# Altium PCB MGMEZZ04.PcbDoc (part 8 of 9)
Units mil, origin at the board's own origin, x right, y up, seen from the top; angles counter-clockwise.
Board outline 3790 x 5472.44 mil, 10 copper layers (TopLayer, InternalPlane1, MidLayer1, InternalPlane2, MidLayer2, MidLayer3, InternalPlane3, MidLayer4, InternalPlane4, BottomLayer), stack 57.08 mil thick; 846 components, 745 nets, 3323 pads, 1906 vias.
Unrouted connection lines stored in the file: 128.
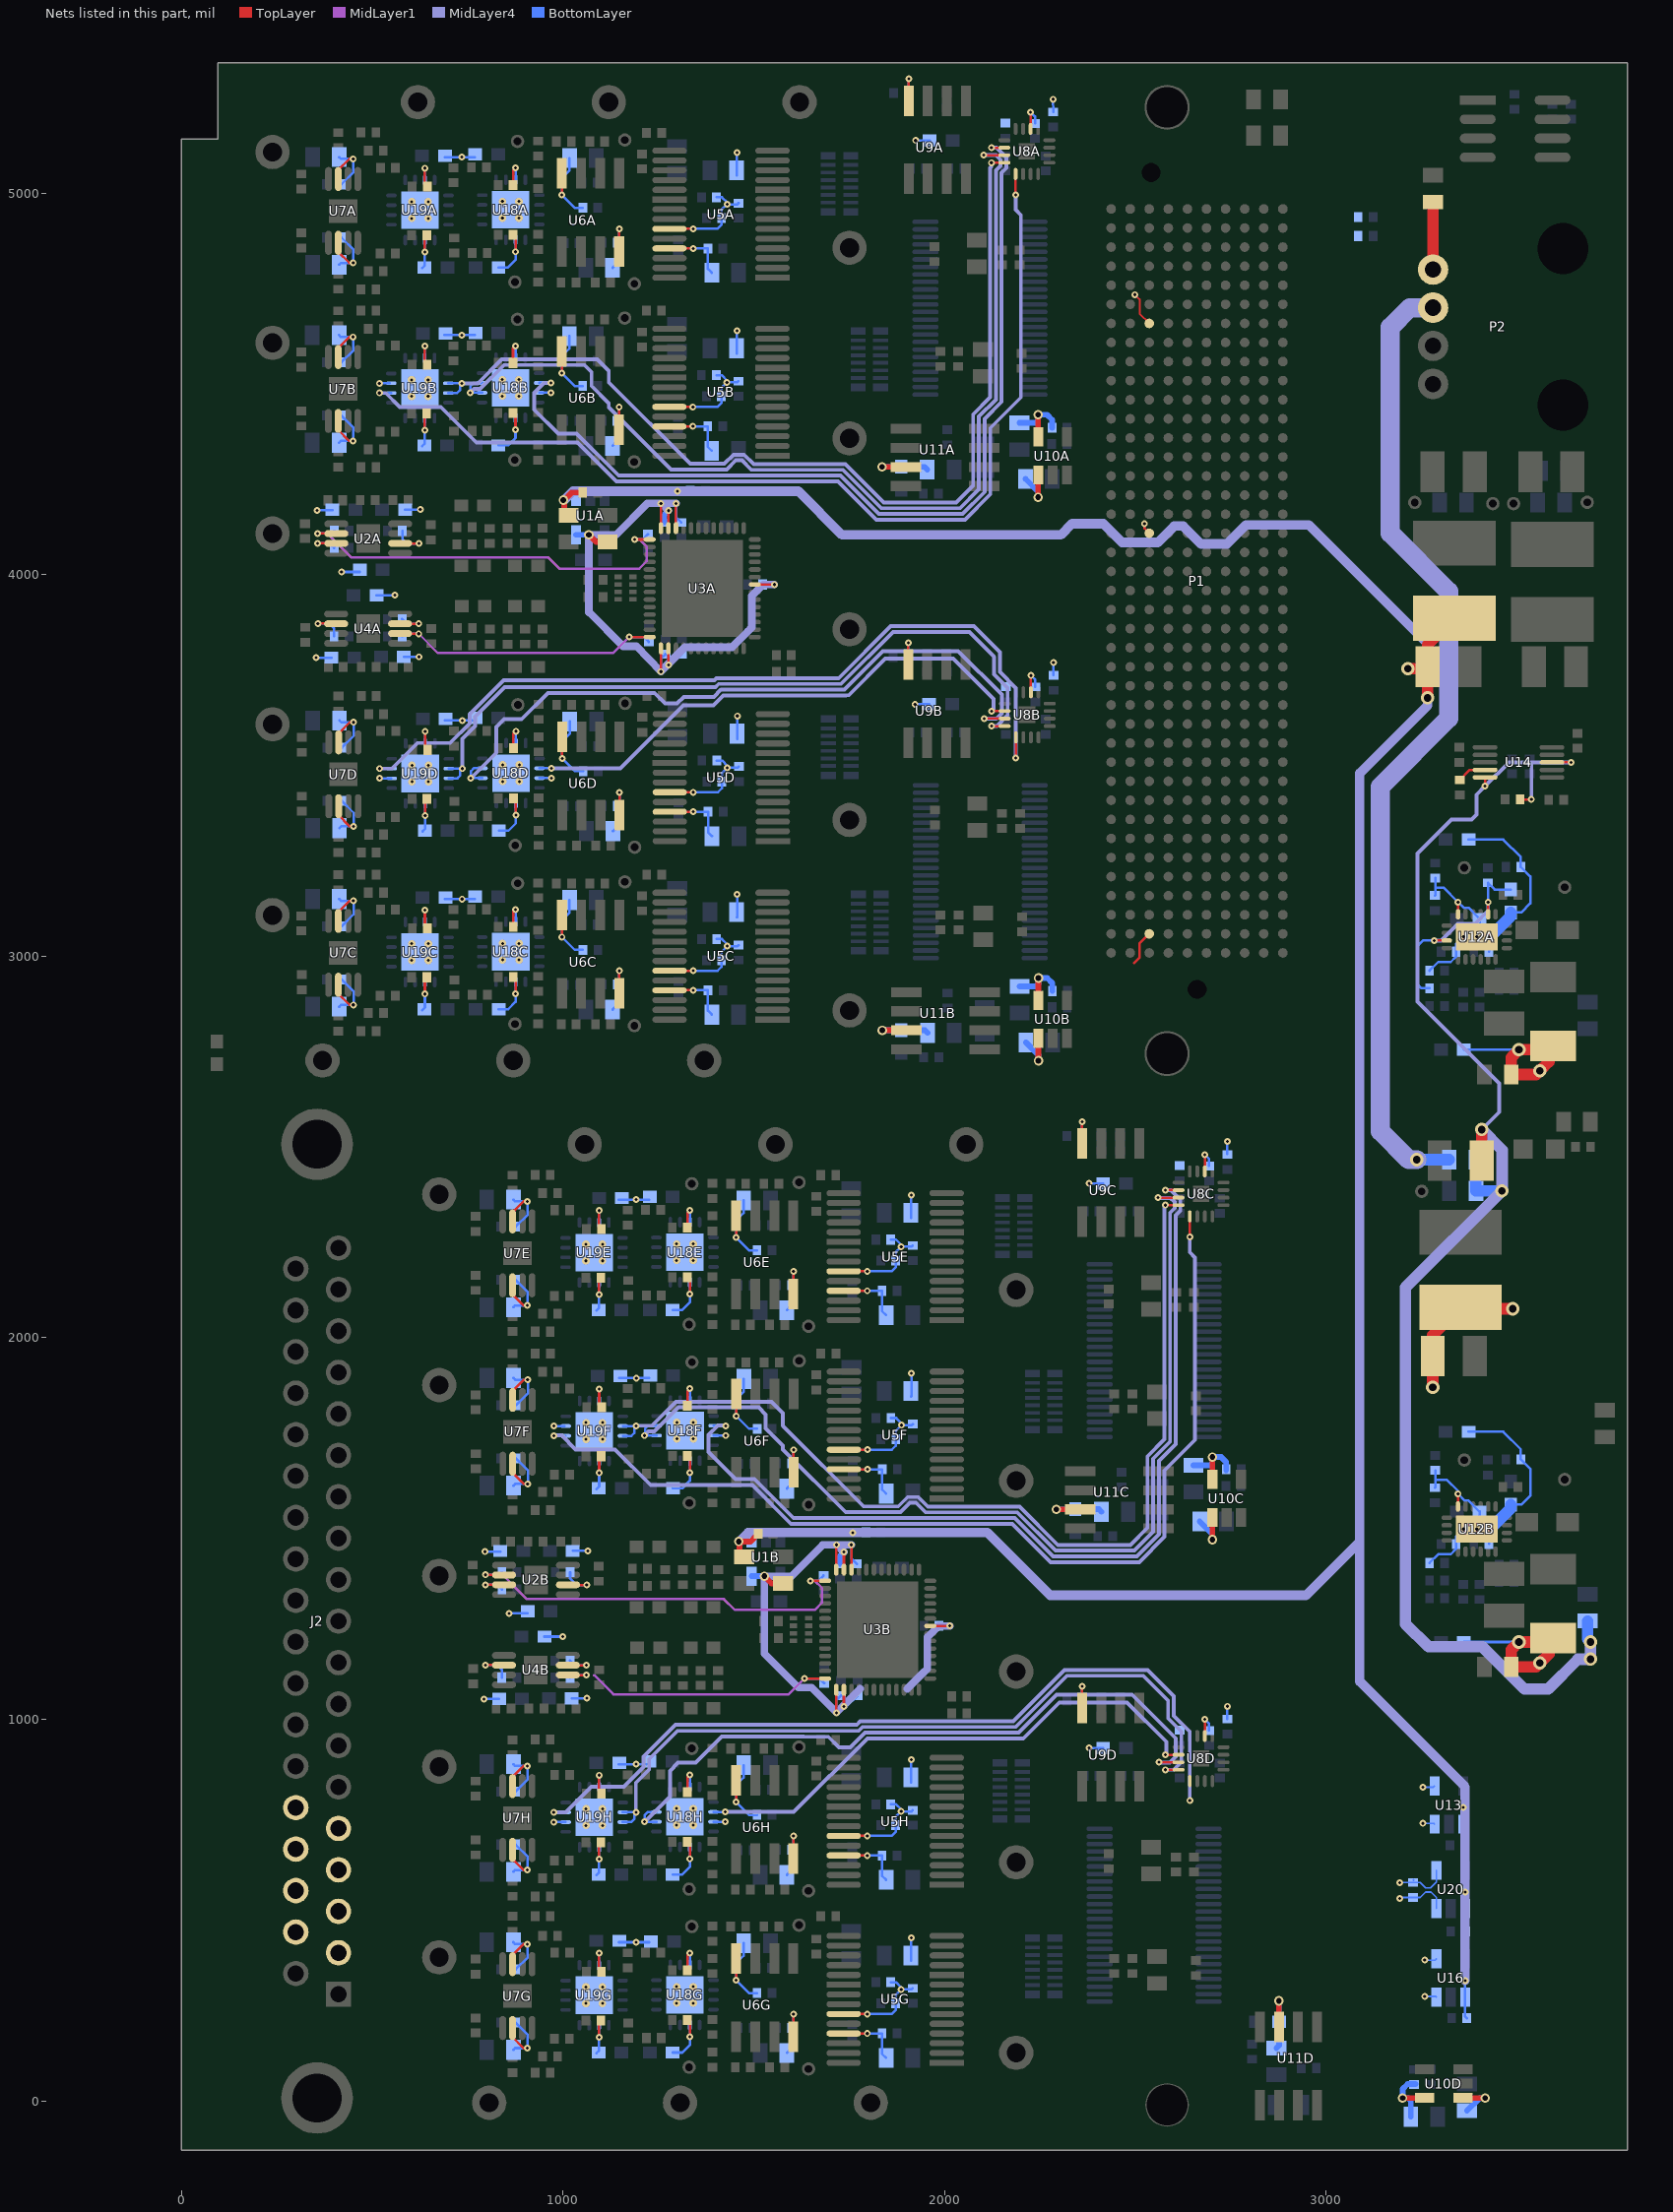
[diagram p16: the nets of this part, all layers, seen from the top]

## Via types
v1: diameter 18, hole 8, TopLayer to BottomLayer, 1296 vias
v2: diameter 18, hole 8, TopLayer to BottomLayer, tented both sides, 203 vias
v3: diameter 19.68, hole 7.87, TopLayer to BottomLayer, 188 vias
v4: diameter 25, hole 15, TopLayer to BottomLayer, tented both sides, 99 vias
v5: diameter 25, hole 15, TopLayer to BottomLayer, 72 vias
v6: diameter 35, hole 20, TopLayer to BottomLayer, 48 vias

## Nets (pads, with @x,y where several pads share a name; then routed paths per layer and width w, separated by ;. In a path a pad name is that pad's centre, name@x,y a point inside that pad or via, vN(x,y) a via of type N, cw(c..) or ccw(c..) an arc to the next point about the centre after c; other vN are vias at no path point) (continued)
NULSWITCHCTRL0A: U8A.2 U18B.14 U18B.15 | length 2464.3
  TopLayer w6.5: v1(2122.64,5119.42) U8A.2@2156.58,5119.42
  MidLayer4 w10: v1(968.93,4502.78) 950.78,4502.78 925,4477 925,4432.63 987.63,4370 1035.86,4370 1145.86,4260 1727.36,4260 1827.94,4159.42 2047.37,4159.42 2105,4217.05 2105,4408.57 2149.5,4453.08 2149.5,5053.82 2161.64,5065.96 2161.64,5094.13 2136.36,5119.42 v1(2122.64,5119.42)
  BottomLayer w6.5: U18B.15@937.67,4477.19 v1@967.84,4477.19 ; U18B.14@937.67,4502.78 v1(968.93,4502.78) v1@971.84,4502.78
  other v1: 968.93,4477.19
NULSWITCHCTRL0B: U8B.2 U18D.14 U18D.15 | length 1454.3
  TopLayer w6.5: v1(2123.46,3642.75) U8B.2@2157.4,3642.75
  MidLayer4 w10: v1@966.71,3492.78 v1(969.99,3492.78) 1150.78,3492.78 1316,3658 1394.57,3658 1420.36,3683.79 1741.21,3683.79 1741.76,3684.33 1749.33,3684.33 1845,3780 2022.64,3780 2128.46,3674.19 v1@2128.46,3642.75
  BottomLayer w6.5: U18D.15@938.73,3467.19 v1@968.9,3467.19 ; U18D.14@938.73,3492.78 v1(969.99,3492.78) v1@972.9,3492.78
  other v1: 969.99,3467.19
NULSWITCHCTRL0C: U8C.2 U18F.14 U18F.15 | length 2462.4
  TopLayer w6.5: v1@2582.15,2387.11 U8C.2@2613.09,2387.11
  MidLayer4 w10: v1@1426.06,1770.47 1406.47,1770.47 1381.5,1745.5 1381.5,1700.32 1452.3,1629.52 1502,1629.52 1603.83,1527.69 2183.87,1527.69 2284.45,1427.11 2503.87,1427.11 2561.5,1484.74 2561.5,1677.08 2606.01,1721.58 2606.01,2321.51 2618.15,2333.65 2618.15,2361.82 2592.86,2387.11 v1(2579.15,2387.11)
  BottomLayer w6.5: U18F.15@1394.8,1743.83 v1@1424.97,1743.83 ; U18F.14@1394.8,1769.43 v1(1426.06,1769.43) v1@1428.97,1769.43
  other v1: 1426.06,1743.83
NULSWITCHCTRL0D: U8D.2 U18H.14 U18H.15 | length 1451.9
  TopLayer w6.5: v1(2579.15,907.11) U8D.2@2613.09,907.11
  MidLayer4 w10: v1@1424.4,757.13 v1(1425.68,757.13) 1604.92,757.13 1797.79,950 2206.34,950 2300.69,1044.35 2478.33,1044.35 2581.21,941.47 2581.21,909.17 v1(2579.15,907.11)
  BottomLayer w6.5: U18H.15@1394.42,731.54 v1@1424.59,731.54 ; U18H.14@1394.42,757.13 v1(1425.68,757.13) v1@1428.59,757.13
  other v1: 1425.68,731.54
NULSWITCHCTRL1A: U8A.3 U18B.6 U18B.7 | length 2658
  TopLayer w6.5: v1(2102.71,5099.73) U8A.3@2156.58,5099.73
  MidLayer4 w10: v1@757.39,4476.69 767.69,4486.99 783.2,4486.99 846.21,4550 1056.3,4550 1075,4531.3 1075,4495 1120,4450 1120,4439.39 1283.39,4276 1429.17,4276 1452.99,4299.82 1468.73,4299.82 1493.56,4275 1733.57,4275 1834.16,4174.42 2040.63,4174.42 2090,4223.79 2090,4414.79 2134.5,4459.29 2134.5,5060.04 2146.64,5072.18 2146.64,5087.92 2134.83,5099.73 v1(2102.71,5099.73)
  BottomLayer w6.5: U18B.6@788.06,4477.19 757.89,4477.19 757.89,4495.19 765.48,4502.78 U18B.7@788.06,4502.78
  other v1: 756.89,4477.19
NULSWITCHCTRL1B: U8B.3 U18D.6 U18D.7 | length 1872.2
  TopLayer w6.5: v1(2103.52,3623.07) U8B.3@2157.4,3623.07
  MidLayer4 w10: v1@758.95,3467.19 825,3533.24 825,3600.72 846.12,3621.83 891.83,3621.83 960.49,3690.49 1174.32,3690.49 1174.8,3690 1240,3690 1267.56,3662.44 1299.23,3662.44 1316.79,3680 1395.36,3680 1414.15,3698.79 1735,3698.79 1735.54,3699.33 1737.5,3699.33 1838.17,3800 2035.99,3800 2150,3685.99 2150,3637.43 2135.64,3623.07 v1@2106.52,3623.07
  BottomLayer w6.5: U18D.6@789.12,3467.19 758.95,3467.19 758.95,3485.19 766.54,3492.78 U18D.7@789.12,3492.78
  other v1: 757.95,3467.19
NULSWITCHCTRL1C: U8C.3 U18F.6 U18F.7 | length 2654.6
  TopLayer w6.5: v1@2562.21,2367.42 U8C.3@2613.09,2367.42
  MidLayer4 w10: v1@1214.39,1744.88 1224.19,1754.68 1239.7,1754.68 1302.72,1817.69 1512.8,1817.69 1531.5,1798.99 1531.5,1762.69 1576.5,1717.69 1576.5,1707.08 1740.58,1543 1884.98,1543 1909.5,1567.51 1925.24,1567.51 1950.06,1542.69 2190.08,1542.69 2290.66,1442.11 2497.14,1442.11 2546.5,1491.48 2546.5,1683.29 2591.01,1727.8 2591.01,2327.73 2603.15,2339.87 2603.15,2355.61 2592.02,2366.74 v1@2559.21,2366.74
  BottomLayer w6.5: U18F.6@1245.2,1743.83 1215.03,1743.83 1215.03,1761.83 1222.62,1769.43 U18F.7@1245.2,1769.43
  other v1: 1214.03,1743.83 2559.21,2367.42
NULSWITCHCTRL1D: U8D.3 U18H.6 U18H.7 | length 1869.8
  TopLayer w6.5: v1(2562.21,887.42) U8D.3@2613.09,887.42
  MidLayer4 w10: v1@1214.64,731.54 1280.69,797.59 1280.69,865.07 1301.81,886.18 1347.52,886.18 1416.18,954.84 1630,954.84 1630.49,954.35 1695.69,954.35 1723.25,926.79 1753.37,926.79 1791.57,965 2194.51,965 2293.86,1064.35 2491.68,1064.35 2605.69,950.34 2605.69,901.78 2590.65,886.74 2562.9,886.74 v1(2562.21,887.42)
  BottomLayer w6.5: U18H.6@1244.81,731.54 1214.64,731.54 1214.64,749.54 1222.23,757.13 U18H.7@1244.81,757.13
  other v1: 1213.64,731.54
NULSWITCHCTRL2A: U8A.4 U19B.14 U19B.15 | length 2558.7
  TopLayer w6.5: v1(2122.64,5080.05) U8A.4@2156.58,5080.05
  MidLayer4 w10: v1(735.03,4501.99) 776.99,4501.99 840,4565 1090,4565 1120,4535 1120,4504.81 1333.81,4291 1422.96,4291 1446.78,4314.82 1474.95,4314.82 1499.77,4290 1739.79,4290 1840.37,4189.42 2030.43,4189.42 2075,4233.99 2075,4421 2119.5,4465.5 2119.5,5066.25 2122.64,5069.39 v1(2122.64,5080.05)
  BottomLayer w6.5: U19B.15@699.86,4476.4 722.44,4476.4 730.03,4483.99 730.03,4501.99 U19B.14@699.86,4501.99
NULSWITCHCTRL2B: U8B.4 U19D.14 U19D.15 | length 1960.7
  TopLayer w6.5: v1(2123.46,3603.38) U8B.4@2157.4,3603.38
  MidLayer4 w10: v1(736.09,3491.99) 736.09,3569.69 770.31,3603.9 770.31,3628.31 847.49,3705.49 1399.63,3705.49 1407.93,3713.79 1728.79,3713.79 1865,3850 2065,3850 2130,3785 2130,3738.79 2165,3703.79 2165,3631.21 2137.17,3603.38 v1@2128.46,3603.38
  BottomLayer w6.5: U19D.15@700.92,3466.4 723.5,3466.4 731.09,3473.99 731.09,3491.99 U19D.14@700.92,3491.99
NULSWITCHCTRL2C: U8C.4 U19F.14 U19F.15 | length 2557.4
  TopLayer w6.5: v1@2582.15,2347.74 U8C.4@2613.09,2347.74
  MidLayer4 w10: v1@1192.17,1769.68 1233.49,1769.68 1296.5,1832.69 1546.5,1832.69 1576.5,1802.69 1576.5,1769.5 1788,1558 1878.77,1558 1903.29,1582.51 1931.45,1582.51 1956.28,1557.69 2196.29,1557.69 2296.87,1457.11 2486.93,1457.11 2531.5,1501.68 2531.5,1689.5 2576.01,1734.01 2576.01,2344.6 v1(2579.15,2347.74)
  BottomLayer w6.5: U19F.15@1157,1743.04 1179.58,1743.04 1187.17,1750.63 1187.17,1768.63 U19F.14@1157,1768.63
  other v1: 1192.17,1768.63
NULSWITCHCTRL2D: U8D.4 U19H.14 U19H.15 | length 1972.6
  TopLayer w6.5: v1(2579.15,867.74) U8D.4@2613.09,867.74
  MidLayer4 w10: v1@1191,756.34 1191,833.26 1226,868.26 1226,896 1299.84,969.84 1775.2,969.84 1785.36,980 2186.34,980 2320.69,1114.35 2520.69,1114.35 2585.69,1049.35 2585.69,1003.14 2620.69,968.14 2620.69,887.75 2600.67,867.74 v1(2579.15,867.74)
  BottomLayer w6.5: U19H.15@1156.61,730.75 1179.19,730.75 1186.78,738.34 1186.78,756.34 U19H.14@1156.61,756.34
  other v1: 1191.78,756.34
NULSWITCHCTRL3A: U8A.5 U19B.6 U19B.7 | length 2702.9
  TopLayer w6.5: v1@2186.11,4996.64 U8A.5@2186.11,5050.52
  MidLayer4 w10: v1(519,4476.4) 534.6,4476.4 ; 535.6,4476.4 572.21,4439.79 680.21,4439.79 773.17,4346.83 1037.82,4346.83 1139.65,4245 1721.15,4245 1821.73,4144.42 2053.58,4144.42 2120,4210.84 2120,4384.66 2200,4464.66 2200,4942.85 2186.11,4956.74 v1(2186.11,4995.64)
  BottomLayer w6.5: v1@516.09,4501.99 v1(519,4501.99) ; v1@519.09,4476.4 U19B.6@549.26,4476.4 ; v1@519.09,4501.99 U19B.7@546.35,4501.99
NULSWITCHCTRL3B: U8B.5 U19D.6 U19D.7 | length 2227.4
  TopLayer w6.5: v1@2186.92,3522.98 U8B.5@2186.93,3573.86
  MidLayer4 w10: v1(520.06,3491.99) 551.99,3491.99 618.99,3558.99 704.18,3558.99 755.31,3610.12 755.31,3634.52 844.77,3723.99 1396.92,3723.99 1401.72,3728.79 1722.57,3728.79 1858.79,3865 2076.83,3865 2145,3796.83 2145,3745 2186.92,3703.08 v1(2186.92,3519.98)
  BottomLayer w6.5: v1@517.15,3491.99 v1(520.06,3491.99) ; v1@520.15,3466.4 U19D.6@550.32,3466.4 ; v1@520.15,3491.99 U19D.7@547.41,3491.99
  other v1: 520.06,3466.4
NULSWITCHCTRL3C: U8C.5 U19F.6 U19F.7 | length 2704.3
  TopLayer w6.5: v1(2642.61,2264.33) U8C.5@2642.62,2318.21
  MidLayer4 w10: v1@976.13,1744.09 996.91,1744.09 1033.52,1707.48 1136.72,1707.48 1229.67,1614.52 1495.79,1614.52 1597.62,1512.69 2177.65,1512.69 2278.23,1412.11 2510.08,1412.11 2576.5,1478.53 2576.5,1652.35 2656.5,1732.35 2656.5,2210.54 2642.61,2224.43 v1(2642.61,2264.33)
  BottomLayer w6.5: v1@973.22,1768.63 v1(976.13,1768.63) ; v1@976.22,1743.04 U19F.6@1006.39,1743.04 ; v1@976.22,1768.63 U19F.7@1003.48,1768.63
  other v1: 976.13,1743.04
NULSWITCHCTRL3D: U8D.5 U19H.6 U19H.7 | length 2172.5
  MidLayer4 w10: v1(975.75,756.34) 1004.68,756.34 ; 1007.68,756.34 1074.68,823.34 1159.87,823.34 1211,874.47 1211,902.21 1294.97,986.18 1770.33,986.18 1779.15,995 2180.12,995 2314.48,1129.35 2532.52,1129.35 2600.69,1061.18 2600.69,1009.35 2642.61,967.43 v1(2642.61,787.33)
  BottomLayer w6.5: v1@972.84,756.34 v1(975.75,756.34) ; v1(975.75,730.75) U19H.6@1006.01,730.75 ; v1(975.75,756.34) U19H.7@1003.1,756.34
P1V8A: C13A.2 C14A.2 C15A.2 C16A.2 C17A.2 C19A.1 U1A.5 U3A.15 U3A.16 U3A.34 U3A.50 U3A.51 U3A.52 | length 1857.7
  TopLayer w6.5: v1(1256.81,3746.15) U3A.15@1256.81,3807.12 U3A.15@1256.81,3808.05 ; U3A.52@1256.81,4122.08 v1(1256.81,4187.05) ; v1(1276.49,3763.15) U3A.16@1276.49,3807.12 U3A.16@1276.49,3808.05 ; U3A.51@1276.49,4122.08 v1(1276.49,4168.05) ; U3A.50@1296.18,4122.08 v1(1296.18,4187.05) ; U3A.34@1498,3974.44 v1(1553.84,3974.44)
  TopLayer w15: v5(1068.11,4104.77) 1087.11,4085.77 C13A.2@1117.11,4085.77
  MidLayer4 w10: v1(1256.81,3746.15) v1@1257.49,3746.15 ; v1(1256.81,4187.05) v1@1257.49,4187.05
  MidLayer4 w20: v1(1256.81,3746.15) 1192.31,3812.65 1157.35,3812.65 1068.11,3901.89 v5(1068.11,4104.77) 1139.03,4104.77 1221.31,4187.05 v1(1256.81,4187.05) ; v1@1257.49,3748.15 1319.35,3810 1443.09,3810 1484,3850.91 1484,3851 1495,3862 1495,3945 1524.44,3974.44 v1(1553.84,3974.44) ; v1(1276.49,4168.05) 1257.49,4187.05 v1(1296.18,4187.05)
  BottomLayer w6.5: v1(1256.81,3746.15) 1256.81,3779.75 C15A.2@1269.11,3792.05 ; v1(1256.81,4187.05) v1@1257.49,4187.05 ; v1(1276.49,3763.15) 1283.21,3763.15 C16A.2@1312.11,3792.05 ; v1(1296.18,4187.05) 1296.86,4186.37 1296.86,4150.3 C14A.2@1310.11,4137.05 ; C19A.1@1527.48,3974.44 v1(1553.84,3974.44)
  BottomLayer w15: U1A.5@1034.61,4104.77 v5(1068.11,4104.77) ; v1@1257.49,4187.05 v1(1276.49,4168.05) 1266.11,4157.67 C17A.2@1266.11,4137.05
P1V8B: C13B.2 C14B.2 C15B.2 C16B.2 C17B.2 C19B.1 U1B.5 U3B.15 U3B.16 U3B.34 U3B.50 U3B.51 U3B.52 | length 1732.5
  TopLayer w6.5: v1(1716.5,1016.5) U3B.15@1716.5,1077.47 U3B.15@1716.5,1078.4 ; U3B.52@1716.5,1392.43 v1(1716.5,1457.4) ; v1(1736.18,1033.5) U3B.16@1736.18,1077.47 U3B.16@1736.18,1078.4 ; U3B.51@1736.18,1392.43 v1(1736.18,1438.4) ; U3B.50@1755.87,1392.43 v1(1755.87,1457.4) ; U3B.34@1957.69,1244.8 v1(2013.53,1244.8)
  TopLayer w15: v5(1527.8,1375.12) 1546.8,1356.12 C13B.2@1576.8,1356.12
  MidLayer4 w10: v1(1716.5,1016.5) v1@1717.18,1016.5 ; v1(1716.5,1457.4) v1@1717.18,1457.4
  MidLayer4 w20: v1@1716.5,1018.5 1652,1083 1617,1083 1527.8,1172.2 v5(1527.8,1375.12) 1598.72,1375.12 1681,1457.4 v1(1716.5,1457.4) ; v1@1717.18,1018.5 1779.04,1080.35 ; v1(1736.18,1438.4) 1717.18,1457.4 v1(1755.87,1457.4) ; 1902.78,1080.35 1943.69,1121.27 1943.69,1121.35 1954.69,1132.35 1954.69,1215.35 1984.13,1244.8 v1(2013.53,1244.8)
  BottomLayer w6.5: v1(1716.5,1016.5) 1716.5,1050.1 C15B.2@1728.8,1062.4 ; v1(1716.5,1457.4) v1@1717.18,1457.4 ; v1(1736.18,1033.5) 1742.9,1033.5 C16B.2@1771.8,1062.4 ; v1(1755.87,1457.4) 1756.55,1456.72 1756.55,1420.65 C14B.2@1769.8,1407.4 ; C19B.1@1987.17,1244.8 v1(2013.53,1244.8)
  BottomLayer w15: U1B.5@1494.3,1375.12 v5(1527.8,1375.12) ; v1@1717.18,1457.4 v1(1736.18,1438.4) 1725.8,1428.02 C17B.2@1725.8,1407.4
P2V5FILT: C5A.2 C5B.2 C7A.2 C7B.2 C58.1 C60.1 C63.1 C101.1 L9.2 R17A.1 R17B.1 U1A.1 U1B.1 U13.1 U16.1 U20.1 | length 8860.2
  TopLayer w15: C5A.2@1003.11,4167.77 1003.11,4195.77 1023.11,4215.77 C7A.2@1051.74,4215.77 ; C5B.2@1474.8,1426.12 1462.8,1438.12 1462.8,1466.12 1491.43,1466.12 C7B.2@1511.43,1486.12
  TopLayer w30: v6(3214.12,3754) 3265.76,3754 v6(3265.76,3677.26) ; C101.1@3265.76,3759.14 3265.76,3816.54 L9.2@3335.65,3886.42
  MidLayer4 w25: v5@1003.11,4195.77 1026.39,4219.05 v1(1300.11,4219.05) 1617,4219.05 1731.28,4104.77 2304.77,4104.77 2334,4134 2416,4134 2465,4085 2559,4085 2602,4128 2625,4128 2672,4081 2740,4081 2790,4131 2954,4131 3265.76,3819.24 v6(3265.76,3677.26) 3265.76,3657.26 3088,3479.5 3088,1098.78 3363.87,822.91 v1(3363.87,315.44) ; v5@1462.8,1466.12 1486.08,1489.4 v1(1759.8,1489.4) 2112.6,1489.4 2277,1325 2947,1325 3088,1466
  BottomLayer w6.5: v1(1300.11,4219.05) 1301.11,4220.05 R17A.1@1334.11,4220.05 ; v1(1759.8,1489.4) 1760.8,1490.4 R17B.1@1793.8,1490.4 ; v1(3358.87,768.91) U13.1@3358.87,725.43 3358.87,674.78 C58.1@3363.36,670.29 ; U16.1@3363.87,271.95 3363.87,221.31 C60.1@3368.36,216.82 ; U16.1@3363.87,275.95 v1@3363.87,319.44 ; U20.1@3363.87,503.91 3363.87,445.78 C63.1@3365.74,443.91 ; U20.1@3363.87,507.91 v1@3363.87,551.4
  BottomLayer w15: v5@1462.8,1466.12 U1B.1@1485.3,1466.12
  other v1: 3363.87,547.4
  other v5: 1460.8,1466.12 1001.11,4195.77
P3V3WRTLOWERRAIL: C65A.2 C73.1 R53A.1 R54A.1 U12A.2 U12A.9 U14.9 | length 642.8
  TopLayer w6.5: v1(3283.02,3041.22) U12A.9@3316.04,3041.22 ; C73.1@3349.98,3462.24 3376.3,3488.56 U14.9@3416.39,3488.56 ; U12A.2@3424.31,3110.12 v1(3424.31,3142.14)
  MidLayer4 w10: v1(3283.02,3041.22) 3301.22,3041.22 3345,3085 3390,3085 3424.31,3119.31 v1@3424.31,3140.14
  BottomLayer w6.5: R54A.1@3270.99,2916.01 3248.99,2916.01 3240,2925 3240,3027.73 3253.49,3041.22 v1(3283.02,3041.22) ; v1@3423.99,3140.45 R53A.1@3423.99,3192.64 3441.62,3175.01 C65A.2@3483.99,3175.01 ; v1@3423.99,3142.45 v1(3424.31,3142.14)
P5V5FILT: C53A.2 C53B.2 C53C.2 C53D.2 C79.1 J2.2 L12.2 U10A.1 U10B.1 U10C.1 U10D.1 | length 801.2
  TopLayer w15: v5(2245.28,4203.18) U10A.1@2245.28,4261.42 ; v5(2246.09,2726.52) U10B.1@2246.09,2784.76 ; v5(2701.78,1470.87) U10C.1@2701.78,1529.11 ; U10D.1@3358.39,7.47 v5(3416.63,7.47)
  TopLayer w30: v6(3279.26,1870.12) C79.1@3279.26,1952 3279.26,2007.22 L12.2@3352.04,2080 ; L12.2@3407,2076 v6(3488.88,2076)
  BottomLayer w15: C53A.2@2212,4251 2245.28,4217.72 v5(2245.28,4203.18) ; C53B.2@2212.81,2774.34 2246.09,2741.06 v5(2246.09,2726.52) ; C53C.2@2668.5,1518.69 2701.78,1485.41 v5(2701.78,1470.87) ; C53D.2@3368.81,-25.81 3402.09,7.47 v5(3416.63,7.47)
P5V5INT: C54.2 C78.1 Ip1.1 R51B.1 R70.1 R71.1 U14.3 U14.10 | length 3937.6
  TopLayer w6.5: v1(3416.39,3445.98) U14.10@3416.39,3468.87 ; C54.2@3508.36,3411.24 v1(3537.79,3411.24) ; U14.3@3608,3508.34 v1(3641.43,3508.34)
  TopLayer w30: C78.1@3407.5,2464 v6(3407.5,2545.88)
  MidLayer4 w10: v6(3407.5,2545.88) 3453,2591.38 3453,2667 3239,2881 3239,3269 3328,3358 3381,3358 3393.99,3370.99 3393.99,3378.79 3394,3423.59 v1(3416.39,3445.98) 3478.75,3508.34 3541,3508.34 ; v1(3537.79,3411.24) 3537.79,3505.13 3541,3508.34 ; v1(3641.43,3508.34) 3541,3508.34
  MidLayer4 w30: v6(3407.5,2545.88) 3461,2492.37 3461,2385.34 3208,2132.34 3208,1250 3268,1190 3409,1190 3519.33,1079.67 3581.67,1079.67 3659.62,1157.62 v6(3692.67,1157.62) v6(3692.67,1202.63)
  BottomLayer w30: R70.1@3392.38,2467 R71.1@3392.38,2385 Ip1.1@3460.38,2385 ; R51B.1@3685,1257.62 3685,1210.3 v6(3692.67,1202.63) v6(3692.67,1157.62)
PG_C2M: R32.2
PG_M2C: R31.2
POSSUPPLY: P2.1 R78.1 | length 166
  TopLayer w30: P2.1@3280,4800 R78.1@3280,4966
POWERENABLE: J2.21
PRSNT_M2C_L: P1.H2 | length 94.1
  TopLayer w6.5: 2496.34,2981.83 2511.34,2996.83 2511.34,3034.33 P1.H2@2536.34,3059.33
SCL_N: J2.3 U16.3 | length 31.6
  BottomLayer w4.5: v1(3258,273.81) 3287.01,273.81 U16.3@3288.87,271.95
SCL_P: J2.22 U16.4 | length 32.2
  BottomLayer w4.5: v1(3258,368.81) 3285.73,368.81 U16.4@3288.87,371.95
SDA_MISO_N: J2.5 U13.3 | length 31.6
  BottomLayer w4.5: v1(3253,727.28) 3282.01,727.28 U13.3@3283.87,725.43
SDA_MISO_P: J2.24 U13.4 | length 32.2
  BottomLayer w4.5: v1(3253,822.28) 3280.73,822.28 U13.4@3283.87,825.43
SDA_MOSI_N: J2.4 R56.2 U20.4 | length 140.3
  BottomLayer w4.5: v1(3193,571.71) 3193.57,572.28 R56.2@3228,572.28 3245.99,572.28 3260.18,558.1 3273.34,558.1 3288.87,573.63 U20.4@3288.87,603.91 ; R56.2@3228.99,578.28 R56.2@3228.99,579.91
SDA_MOSI_P: J2.23 R56.1 U20.3 | length 137.7
  BottomLayer w4.5: v1(3193,530.56) 3195.35,532.91 R56.1@3228,532.91 3245.99,532.91 3260.18,547.1 3274.94,547.1 3288.87,533.16 U20.3@3288.87,503.91
SPI.CSN: P1.H23 | length 30.2
  TopLayer w6.5: v2(2523.84,4134.33) 2523.84,4121.83 P1.H23@2536.34,4109.33
SPI_ADDR2: P1.H34 | length 90.5
  TopLayer w5: v2(2498.84,4734.33) 2511.34,4721.83 2511.34,4684.33 P1.H34@2536.34,4659.33
VCC5V0: P2.2 R70.2 | length 2589.5
  MidLayer4 w50: v6(3237.5,2467) 3216,2467 3142,2541 3142,3445 3321,3624 3321,3956 3168,4109 3168,4648.79 3219.21,4700 P2.2@3280,4700
  BottomLayer w30: v6(3237.5,2467) R70.2@3322.38,2467
VCM1A: C23A.1 C24A.2 C34A.1 U2A.2 U3A.1 | length 1201.6
  TopLayer w6.5: v1(357.14,4108.46) U2A.2@406.17,4108.46 ; v1(1188.31,4092.55) U3A.1@1227.28,4092.55 U3A.1@1229.11,4092.55
  MidLayer1 w6.5: v1(357.14,4108.46) 382.54,4108.46 446,4045 962,4045 990.75,4016.25 1200.2,4016.25 1219,4035.05 1219,4074 1200.45,4092.55 v1(1188.31,4092.55)
  BottomLayer w6.5: v1(356.11,4169.05) C23A.1@396.11,4169.05 ; v1(357.14,4108.46) 393.81,4108.46 C24A.2@400.46,4115.11 ; v1(1188.31,4092.55) 1209.24,4092.55 C34A.1@1223.11,4106.42
VCM1B: C23B.1 C24B.2 C34B.1 U2B.2 U3B.1 | length 1195.6
  TopLayer w6.5: v1@799.83,1378.81 U2B.2@845.86,1378.81 ; v1(1648,1362.91) U3B.1@1686.97,1362.91 U3B.1@1688.8,1362.91
  MidLayer1 w6.5: 816.83,1378.81 842.23,1378.81 905.69,1315.35 1421.69,1315.35 1450.44,1286.6 1659.89,1286.6 1678.69,1305.4 1678.69,1344.35 1660.14,1362.91 v1(1648,1362.91)
  BottomLayer w6.5: v1(795.8,1439.4) C23B.1@835.8,1439.4 ; v1(796.83,1378.81) C24B.2@830.5,1378.81 ; C24B.2@833.5,1378.81 C24B.2@840.15,1385.46 ; v1(1648,1362.91) 1668.93,1362.91 C34B.1@1682.8,1376.77
VCM2A: C29A.1 C30A.2 C35A.1 U3A.14 U4A.2 | length 832.4
  TopLayer w6.5: U4A.2@573.11,3845.41 v1(622.14,3845.41) ; v1(1173.31,3836.65) U3A.14@1227.28,3836.65
  MidLayer1 w6.5: v1(622.14,3845.41) 672.55,3795 1131.66,3795 v1(1173.31,3836.65)
  BottomLayer w6.5: C30A.2@578.82,3838.77 585.47,3845.41 v1(622.14,3845.41) ; C29A.1@583.17,3784.82 v1(623.17,3784.82) ; v1(1173.31,3836.65) 1209.52,3836.65 ; 1212.52,3836.65 C35A.1@1225.11,3824.05
VCM2B: C29B.1 C30B.2 C35B.1 U3B.14 U4B.2 | length 832.4
  TopLayer w6.5: U4B.2@1012.8,1115.76 v1(1061.83,1115.76) ; v1@1636,1107 U3B.14@1686.97,1107
  MidLayer1 w6.5: 1081.83,1115.76 1132.24,1065.35 1591.35,1065.35 v1(1633,1107)
  BottomLayer w6.5: C30B.2@1018.51,1109.12 1025.16,1115.76 v1(1061.83,1115.76) ; C29B.1@1022.86,1055.17 v1(1062.86,1055.17) ; v1(1633,1107) 1672.21,1107 C35B.1@1684.8,1094.4
VDD1A: C1A.1 C2A.2 C40A.2 C40B.2 C43A.2 C43B.2 C44A.2 C44B.2 C47A.2 C47B.2 C48A.2 C48B.2 C51A.2 C52A.1 C77A.2 C88A.1 C88B.1 C89A.2 C89B.2 C92A.1 C92B.1 C93A.2 C93B.2 C96A.2 C96B.2 C110A.2 R27A.2 R37A.1 R41A.1 U2A.3 U5A.25 U5B.25 U6A.8 U6B.8 U7A.3 U7B.3 U8A.14 U9A.8 U10A.5 U18A.11 U18B.11 U19A.11 U19B.11 | length 2257.2
  TopLayer w6.5: v1(357.14,4082.31) U2A.3@406.17,4082.31 ; U7B.3@411.07,4570.65 411.07,4594.36 440.04,4623.34 v1(450.24,4623.34) ; U7A.3@411.31,5037.31 411.31,5061.03 440.29,5090 v1(450.49,5090) ; v1(637.86,4599.19) 637.86,4557.36 C93B.2@644.23,4550.99 ; v1(638.1,5065.85) 638.1,5024.03 C93A.2@644.48,5017.65 ; C89B.2@874.07,4559.82 C89B.2@869.23,4554.99 869.23,4593.56 v1(875.66,4599.99) ; C89A.2@874.31,5026.48 C89A.2@869.48,5021.65 869.48,5060.22 v1(875.9,5066.65) ; v1(997.08,4528.62) U6B.8@997.08,4585.62 ; v1(997.32,4995.28) U6A.8@997.32,5052.29 ; U5B.25@1278.86,4388.79 v1(1340.69,4388.79) ; U5A.25@1279.11,4855.45 v1(1340.94,4855.45) ; U9A.8@1906.01,5242.6 v1(1906,5299.66) ; U8A.14@2225.48,5168.63 v1(2225.48,5212.57)
  TopLayer w15: U10A.5@2245.28,4361.42 v5(2245.28,4419.66)
  BottomLayer w6.5: v1(357.14,4082.31) 388.25,4082.31 C2A.2@400.46,4070.11 ; C43B.2@413.37,4627.99 418.02,4623.34 450.86,4623.34 450.86,4588.04 C44B.2@419.45,4556.62 ; C43A.2@413.61,5094.65 418.26,5090 451.11,5090 451.11,5054.7 C44A.2@419.69,5023.29 ; v1(419.69,4007.38) C1A.1@467.68,4007.38 ; U19B.11@637.86,4567.93 v1(637.86,4599.19) ; U19A.11@638.1,5034.59 v1(638.1,5065.85) ; C92B.1@689.86,4627.99 v1(735.25,4627.99) C88B.1@768.86,4627.99 ; C92A.1@690.11,5094.65 v1(735.5,5094.65) C88A.1@769.11,5094.65 ; U18B.11@875.66,4568.73 v1(875.66,4599.99) ; U18A.11@875.9,5035.39 v1(875.9,5066.65) ; C96B.2@1016.86,4625.62 1016.86,4592.99 997.08,4573.2 v1(997.08,4528.62) 1030.71,4494.99 C40B.2@1051.86,4494.99 ; C96A.2@1017.11,5092.29 1017.11,5059.65 997.32,5039.86 v1(997.32,4995.28) 1030.96,4961.65 C40A.2@1052.11,4961.65 ; v1(1340.69,4388.79) C48B.2@1379.49,4388.79 1379.49,4335.36 C47B.2@1389.86,4324.99 ; v1(1340.94,4855.45) C48A.2@1379.74,4855.45 1379.74,4802.02 C47A.2@1390.11,4791.65 ; C52A.1@1906,5262.6 v1(1906,5299.66) ; v1(1923.94,5138.24) C77A.2@1961,5138.24 ; v1(2225.48,5212.57) 2236.92,5201.13 C51A.2@2236.92,5182.95 ; v1(2284.44,5246.51) R37A.1@2284.56,5213.58
  BottomLayer w15: C110A.2@2196,4398 2239,4398 2245.28,4404.28 v5(2245.28,4419.66) 2268.34,4419.66 2281.65,4406.35 R27A.2@2281.65,4385.43
VDD1B: C1B.1 C2B.2 C40E.2 C40F.2 C43E.2 C43F.2 C44E.2 C44F.2 C47E.2 C47F.2 C48E.2 C48F.2 C51C.2 C52C.1 C77C.2 C88E.1 C88F.1 C89E.2 C89F.2 C92E.1 C92F.1 C93E.2 C93F.2 C96E.2 C96F.2 C110C.2 R27C.2 R37C.1 R41C.1 U2B.3 U5E.25 U5F.25 U6E.8 U6F.8 U7E.3 U7F.3 U8C.14 U9C.8 U10C.5 U18E.11 U18F.11 U19E.11 U19F.11 | length 2251.2
  TopLayer w6.5: v1@799.83,1352.66 U2B.3@845.86,1352.66 ; U7E.3@867.82,2305 867.82,2328.72 896.79,2357.69 v1(906.99,2357.69) ; U7F.3@868.2,1837.29 868.2,1861.01 897.18,1889.98 v1(907.38,1889.98) ; v1(1094.61,2333.54) 1094.61,2291.72 C93E.2@1100.98,2285.34 ; v1(1094.99,1865.83) 1094.99,1824.01 C93F.2@1101.37,1817.63 ; C89E.2@1330.82,2294.17 C89E.2@1325.98,2289.34 1325.98,2327.91 v1(1332.41,2334.34) ; C89F.2@1331.2,1826.46 C89F.2@1326.37,1821.63 1326.37,1860.2 v1(1332.8,1866.63) ; v1(1453.83,2262.97) U6E.8@1453.83,2319.98 ; v1(1454.21,1795.26) U6F.8@1454.21,1852.27 ; U5E.25@1735.61,2123.14 v1(1797.44,2123.14) ; U5F.25@1736,1655.43 v1(1797.83,1655.43) ; U9C.8@2360.4,2509.24 v1(2360.39,2566.31) ; U8C.14@2681.99,2436.32 v1(2681.99,2480.26)
  TopLayer w15: U10C.5@2701.78,1629.11 v5(2701.78,1687.35)
  BottomLayer w6.5: v1(796.83,1352.66) 824.94,1352.66 ; 827.94,1352.66 C2B.2@840.15,1340.46 ; v1(859.38,1277.74) C1B.1@907.37,1277.74 ; C43E.2@870.12,2362.34 874.77,2357.69 907.61,2357.69 907.61,2322.39 C44E.2@876.2,2290.98 ; C43F.2@870.5,1894.63 875.15,1889.98 908,1889.98 908,1854.68 C44F.2@876.58,1823.27 ; U19E.11@1094.61,2302.28 v1(1094.61,2333.54) ; U19F.11@1094.99,1834.57 v1(1094.99,1865.83) ; C92E.1@1146.61,2362.34 v1(1192,2362.34) C88E.1@1225.61,2362.34 ; C92F.1@1147,1894.63 v1(1192.39,1894.63) C88F.1@1226,1894.63 ; U18E.11@1332.41,2303.08 v1(1332.41,2334.34) ; U18F.11@1332.8,1835.37 v1(1332.8,1866.63) ; C96E.2@1473.61,2359.98 1473.61,2327.34 1453.83,2307.55 v1(1453.83,2262.97) 1487.46,2229.34 C40E.2@1508.61,2229.34 ; C96F.2@1474,1892.27 1474,1859.63 1454.21,1839.84 v1(1454.21,1795.26) 1487.85,1761.63 C40F.2@1509,1761.63 ; v1(1797.44,2123.14) C48E.2@1836.24,2123.14 1836.24,2069.71 C47E.2@1846.61,2059.34 ; v1(1797.83,1655.43) C48F.2@1836.63,1655.43 1836.63,1602 C47F.2@1847,1591.63 ; C52C.1@2360.39,2529.24 v1(2360.39,2566.31) ; v1(2378.33,2404.89) C77C.2@2415.39,2404.89 ; v1(2681.99,2480.26) 2693.43,2468.82 C51C.2@2693.43,2450.64 ; v1(2740.95,2514.2) R37C.1@2741.06,2481.27
  BottomLayer w15: C110C.2@2652.5,1665.69 2695.5,1665.69 2701.78,1671.97 v5(2701.78,1687.35) 2724.85,1687.35 2738.15,1674.04 R27C.2@2738.15,1653.12
VDD2A: C3A.2 C4A.1 C40C.2 C40D.2 C43C.2 C43D.2 C44C.2 C44D.2 C47C.2 C47D.2 C48C.2 C48D.2 C51B.2 C52B.1 C77B.2 C88C.1 C88D.1 C89C.2 C89D.2 C92C.1 C92D.1 C93C.2 C93D.2 C96C.2 C96D.2 C110B.2 R27B.2 R37B.1 R41B.1 U4A.3 U5C.25 U5D.25 U6C.8 U6D.8 U7C.3 U7D.3 U8B.14 U9B.8 U10B.5 U18C.11 U18D.11 U19C.11 U19D.11 | length 2256.2
  TopLayer w6.5: U7C.3@411.51,3092.68 411.51,3116.4 440.49,3145.37 v1(450.69,3145.37) ; U7D.3@412.13,3560.65 412.13,3584.36 441.1,3613.34 v1(451.3,3613.34) ; U4A.3@573.11,3871.56 v1(622.14,3871.56) ; v1(638.3,3121.22) 638.3,3079.4 C93C.2@644.68,3073.02 ; v1(638.92,3589.19) 638.92,3547.36 C93D.2@645.29,3540.99 ; C89C.2@874.51,3081.85 C89C.2@869.68,3077.02 869.68,3115.59 v1(876.11,3122.02) ; C89D.2@875.13,3549.82 C89D.2@870.29,3544.99 870.29,3583.56 v1(876.72,3589.99) ; v1(997.52,3050.65) U6C.8@997.52,3107.66 ; v1(998.14,3518.62) U6D.8@998.14,3575.62 ; U5C.25@1279.31,2910.82 v1(1341.14,2910.82) ; U5D.25@1279.92,3378.79 v1(1341.75,3378.79) ; U9B.8@1904.71,3764.89 v1(1904.7,3821.95) ; U8B.14@2226.3,3691.97 v1(2226.3,3735.91)
  TopLayer w15: U10B.5@2246.09,2884.76 v5(2246.09,2942.99)
  BottomLayer w6.5: C43C.2@413.81,3150.02 418.46,3145.37 451.31,3145.37 451.31,3110.07 C44C.2@419.89,3078.66 ; C43D.2@414.43,3617.99 419.08,3613.34 451.92,3613.34 451.92,3578.04 C44D.2@420.51,3546.62 ; C4A.1@511.6,3946.49 v1(559.58,3946.49) ; C3A.2@578.82,3883.77 591.02,3871.56 ; 592.02,3871.56 v1(622.14,3871.56) ; U19C.11@638.3,3089.96 v1(638.3,3121.22) ; U19D.11@638.92,3557.93 v1(638.92,3589.19) ; C92C.1@690.31,3150.02 v1(735.7,3150.02) C88C.1@769.31,3150.02 ; C92D.1@690.92,3617.99 v1(736.31,3617.99) C88D.1@769.92,3617.99 ; U18C.11@876.11,3090.76 v1(876.11,3122.02) ; U18D.11@876.72,3558.73 v1(876.72,3589.99) ; C96C.2@1017.31,3147.66 1017.31,3115.02 997.52,3095.23 v1(997.52,3050.65) 1031.16,3017.02 C40C.2@1052.31,3017.02 ; C96D.2@1017.92,3615.62 1017.92,3582.99 998.14,3563.2 v1(998.14,3518.62) 1031.77,3484.99 C40D.2@1052.92,3484.99 ; v1(1341.14,2910.82) C48C.2@1379.94,2910.82 1379.94,2857.39 C47C.2@1390.31,2847.02 ; v1(1341.75,3378.79) C48D.2@1380.55,3378.79 1380.55,3325.36 C47D.2@1390.92,3314.99 ; C52B.1@1904.7,3784.89 v1(1904.7,3821.95) ; v1(1922.64,3660.53) C77B.2@1959.7,3660.53 ; v1(2226.3,3735.91) 2237.74,3724.47 C51B.2@2237.74,3706.29 ; v1(2285.26,3769.85) R37B.1@2285.37,3736.92
  BottomLayer w15: C110B.2@2196.81,2921.34 2239.81,2921.34 2246.09,2927.62 v5(2246.09,2942.99) 2269.16,2942.99 2282.46,2929.69 R27B.2@2282.46,2908.77
VDD2B: C3B.2 C4B.1 C40G.2 C40H.2 C43G.2 C43H.2 C44G.2 C44H.2 C47G.2 C47H.2 C48G.2 C48H.2 C51D.2 C52D.1 C77D.2 C88G.1 C88H.1 C89G.2 C89H.2 C92G.1 C92H.1 C93G.2 C93H.2 C96G.2 C96H.2 C110D.2 R27D.2 R37D.1 R41D.1 U4B.3 U5G.25 U5H.25 U6G.8 U6H.8 U7G.3 U7H.3 U8D.14 U9D.8 U10D.5 U18G.11 U18H.11 U19G.11 U19H.11 | length 2257.2
  TopLayer w6.5: U7G.3@867.82,358.29 867.82,382.01 896.79,410.98 v1(906.99,410.98) ; U7H.3@867.82,825 867.82,848.72 896.79,877.69 v1(906.99,877.69) ; U4B.3@1012.8,1141.91 v1(1061.83,1141.91) ; v1(1094.61,386.83) 1094.61,345.01 C93G.2@1100.98,338.63 ; v1(1094.61,853.54) 1094.61,811.72 C93H.2@1100.98,805.34 ; C89G.2@1330.82,347.46 C89G.2@1325.98,342.63 1325.98,381.2 v1(1332.41,387.63) ; C89H.2@1330.82,814.17 C89H.2@1325.98,809.34 1325.98,847.91 v1(1332.41,854.34) ; v1(1453.83,316.26) U6G.8@1453.83,373.27 ; v1(1453.83,782.97) U6H.8@1453.83,839.98 ; U5G.25@1735.61,176.43 v1(1797.44,176.43) ; U5H.25@1735.61,643.14 v1(1797.44,643.14) ; U9D.8@2360.4,1029.24 v1(2360.39,1086.31) ; U8D.14@2681.99,956.32 v1(2681.99,1000.26)
  TopLayer w15: v5(3200.16,7.47) U10D.5@3258.39,7.47
  BottomLayer w6.5: C43G.2@870.12,415.63 874.77,410.98 907.61,410.98 907.61,375.68 C44G.2@876.2,344.27 ; C43H.2@870.12,882.34 874.77,877.69 907.61,877.69 907.61,842.39 C44H.2@876.2,810.98 ; C4B.1@951.29,1216.84 v1(999.27,1216.84) ; C3B.2@1018.51,1154.12 1030.71,1141.91 v1(1061.83,1141.91) ; U19G.11@1094.61,355.57 v1(1094.61,386.83) ; U19H.11@1094.61,822.28 v1(1094.61,853.54) ; C92G.1@1146.61,415.63 v1(1192,415.63) C88G.1@1225.61,415.63 ; C92H.1@1146.61,882.34 v1(1192,882.34) C88H.1@1225.61,882.34 ; U18G.11@1332.41,356.37 v1(1332.41,387.63) ; U18H.11@1332.41,823.08 v1(1332.41,854.34) ; C96G.2@1473.61,413.27 1473.61,380.63 1453.83,360.84 v1(1453.83,316.26) 1487.46,282.63 C40G.2@1508.61,282.63 ; C96H.2@1473.61,879.98 1473.61,847.34 1453.83,827.55 v1(1453.83,782.97) 1487.46,749.34 C40H.2@1508.61,749.34 ; v1(1797.44,176.43) C48G.2@1836.24,176.43 1836.24,123 C47G.2@1846.61,112.63 ; v1(1797.44,643.14) C48H.2@1836.24,643.14 1836.24,589.71 C47H.2@1846.61,579.34 ; C52D.1@2360.39,1049.24 v1(2360.39,1086.31) ; v1(2378.33,924.89) C77D.2@2415.39,924.89 ; v1(2681.99,1000.26) 2693.43,988.82 C51D.2@2693.43,970.64 ; v1(2740.95,1034.2) R37D.1@2741.06,1001.27
  BottomLayer w15: C110D.2@3221.81,-41.81 3221.81,1.19 3215.54,7.47 v5(3200.16,7.47) 3200.16,30.53 3213.46,43.84 R27D.2@3234.39,43.84
VLOWERRAILA: C61A.2 C65A.1 C66A.1 C67A.2 C68A.2 C69A.2 R49A.1 R57A.2 R59A.2 R63A.2 R65A.2 Rfb3A.2 U12A.6 U12A.21 | length 1421.8
  TopLayer w6.5: U12A.6@3345.57,3110.12 v1(3345.57,3142.14)
  TopLayer w30: C61A.2@3594.11,2765.41 C61A.2@3583.71,2755.01 ; C61A.2@3583.71,2755.01 3583.71,2723.71 v6(3560,2700) 3550,2690 R49A.1@3485,2690 3485,2735.01 v6(3505,2755.01) C61A.2@3583.71,2755.01
  BottomLayer w6.5: C66A.1@3270.62,2962.01 3293.61,2985 3326.37,2985 3340.36,2998.99 Rfb3A.2@3340.36,3012.01 3340.36,3031.65 U12A.21@3359.78,3051.06 ; R63A.2@3284.99,3159.38 3285.99,3160.38 3285.99,3180 ; R65A.2@3285.99,3205.01 3285.99,3180 ; C67A.2@3360.99,2755.01 v6(3505,2755.01) ; C69A.2@3372.99,3306.01 3463.99,3306.01 3509.99,3260.01 R59A.2@3509.99,3234.01 3535,3209 3535,3138.7 3511.31,3115.01 C65A.1@3483.99,3115.01 ; U12A.21@3394.78,3051.07 3401.99,3058.28 C68A.2@3401.99,3097.01 C68A.2@3401.2,3097.01 ; C68A.2@3401.2,3099.01 3373.2,3127 3360.7,3127 v1(3345.57,3142.14) 3307.7,3180 3285.99,3180 ; R57A.2@3426.36,3012.01 3426.36,3047.65 U12A.21@3429.78,3051.06
  BottomLayer w30: U12A.21@3359.78,3051.06 U12A.21@3429.78,3051.06 3483.99,3105.28 C65A.1@3483.99,3115.01
VLOWERRAILB: C61B.2 C65B.1 C66B.1 C67B.2 C68B.2 C69B.2 R49B.1 R57B.2 R59B.2 R63B.2 R65B.2 Rfb3B.2 U12B.6 U12B.21 | length 1428.1
  TopLayer w6.5: U12B.6@3345.57,1557.74 v1(3345.57,1590.76)
  TopLayer w30: C61B.2@3594.11,1213.03 C61B.2@3583.71,1202.63 ; C61B.2@3583.71,1202.63 3583.71,1171.33 v6(3560,1147.62) 3550,1137.62 R49B.1@3485,1137.62 3485,1182.63 v6(3505,1202.63) C61B.2@3583.71,1202.63
  BottomLayer w6.5: C66B.1@3270.62,1409.63 3293.61,1432.62 3326.37,1432.62 3340.36,1446.61 Rfb3B.2@3340.36,1459.63 3340.36,1479.27 U12B.21@3359.78,1498.68 ; R63B.2@3284.99,1607 3285.99,1608 3285.99,1627.62 ; R65B.2@3285.99,1652.63 3285.99,1627.62 ; C67B.2@3360.99,1202.63 v6(3505,1202.63) ; C69B.2@3372.99,1753.63 3463.99,1753.63 3509.99,1707.63 R59B.2@3509.99,1681.63 3535,1656.62 3535,1586.32 3511.31,1562.63 C65B.1@3483.99,1562.63 ; U12B.21@3394.78,1498.69 3401.99,1505.9 C68B.2@3401.99,1544.63 3401.2,1544.63 3372.83,1573 3363.33,1573 v1(3345.57,1590.76) 3345.57,1598.4 3316.35,1627.62 3285.99,1627.62 ; R57B.2@3426.36,1459.63 3426.36,1495.27 U12B.21@3429.78,1498.68
  BottomLayer w30: U12B.21@3359.78,1498.68 U12B.21@3429.78,1498.68 3483.99,1552.9 C65B.1@3483.99,1562.63
VSS1A: C9A.1 C10A.2 C36A.2 C36B.2 C37A.2 C37B.2 C45A.2 C45B.2 C46A.2 C46B.2 C49A.2 C49B.2 C50A.2 C50B.2 C80A.2 C80B.2 C83A.2 C83B.2 C90A.1 C90B.1 C91A.2 C91B.2 C94A.1 C94B.1 C95A.2 C95B.2 C102A.2 R39A.1 U2A.6 U5A.23 U5B.23 U6A.4 U6B.4 U7A.6 U7B.6 U11A.3 U18A.2 U18A.17 U18B.2 U18B.17 U19A.2 U19A.17 U19B.2 U19B.17 | length 2250.5
  TopLayer w6.5: U7B.6@411.07,4403.32 411.07,4379.61 440.04,4350.63 v1(450.24,4350.63) ; U7A.6@411.31,4869.99 411.31,4846.27 440.29,4817.3 v1(450.49,4817.3) ; U2A.6@573.49,4081.75 v1(622.52,4081.75) ; v1(637.86,4379.19) 637.86,4418.06 C95B.2@642.78,4422.99 ; v1(638.1,4845.85) 638.1,4884.73 C95A.2@643.02,4889.65 ; v1(875.66,4379.99) C91B.2@875.66,4417.41 ; v1(875.9,4846.65) C91A.2@875.9,4884.07 ; U6B.4@1147.23,4382.78 v1(1147.23,4439.79) ; U6A.4@1147.48,4849.44 v1(1147.48,4906.45) ; U5B.23@1278.86,4439.99 v1(1340.69,4439.99) ; U5A.23@1279.11,4906.65 v1(1340.94,4906.65)
  TopLayer w15: v5(1836.14,4282.62) U11A.3@1899.38,4282.62
  BottomLayer w6.5: C45B.2@413.37,4345.99 418.02,4350.63 450.86,4350.63 450.86,4385.93 C46B.2@419.45,4417.35 ; C45A.2@413.61,4812.65 418.26,4817.3 451.11,4817.3 451.11,4852.59 C46A.2@419.69,4884.01 ; C10A.2@579.2,4115.11 579.2,4093.97 591.41,4081.75 v1(622.52,4081.75) ; C9A.1@586.11,4171.05 v1(626.11,4171.05) ; C94B.1@630.86,4336.99 637.86,4343.98 v1(637.86,4379.19) U19B.2@637.86,4410.45 ; C94A.1@631.11,4803.65 638.1,4810.64 v1(638.1,4845.85) U19A.2@638.1,4877.11 ; C90B.1@830.86,4338.99 855.86,4338.99 875.66,4358.78 v1(875.66,4379.99) U18B.2@875.66,4411.25 ; C90A.1@831.11,4805.65 856.11,4805.65 875.9,4825.44 v1(875.9,4846.65) U18A.2@875.9,4877.91 ; C83B.2@1129.86,4337.99 1141.86,4349.99 C80B.2@1141.86,4403.99 1147.23,4409.36 v1(1147.23,4439.79) ; C83A.2@1130.11,4804.65 1142.11,4816.65 C80A.2@1142.11,4870.65 1147.48,4876.02 v1(1147.48,4906.45) ; v1@1340.49,4439.79 v1(1340.69,4439.99) 1404.86,4439.99 1415.23,4450.36 C36B.2@1415.23,4467.99 1415.23,4489.89 v1(1429.7,4504.36) ; v1@1340.74,4906.45 v1(1340.94,4906.65) 1405.11,4906.65 1415.48,4917.02 C36A.2@1415.48,4934.65 1415.48,4956.55 v1(1429.95,4971.02) ; C37B.2@1402.23,4522.99 1416.07,4522.99 1429.7,4509.36 v1(1429.7,4504.36) ; C37A.2@1402.48,4989.65 1416.32,4989.65 1429.95,4976.02 v1(1429.95,4971.02) ; C49B.2@1455.23,4579.79 1455.86,4580.42 v1(1455.86,4639.99) ; C49A.2@1455.48,5046.45 1456.11,5047.08 v1(1456.11,5106.65) ; C50B.2@1459.86,4507.36 1456.86,4504.36 v1(1429.7,4504.36) ; C50A.2@1460.11,4974.02 1457.11,4971.02 v1(1429.95,4971.02) ; R39A.1@1880.62,4282.62 R39A.1@1881,4283
  BottomLayer w15: v5(1836.14,4282.62) R39A.1@1880.62,4282.62 ; R39A.1@1886,4283 1947.71,4283 C102A.2@1954.71,4276
  other v3: 603.41,4467.54 646.71,4467.54 841.21,4468.33 884.52,4468.33 603.41,4510.84 646.71,4510.84 841.21,4511.64 884.52,4511.64 603.65,4934.2 646.96,4934.2 841.46,4934.99 884.76,4934.99 603.65,4977.51 646.96,4977.51 841.46,4978.3 884.76,4978.3
VSS1B: C9B.1 C10B.2 C36E.2 C36F.2 C37E.2 C37F.2 C45E.2 C45F.2 C46E.2 C46F.2 C49E.2 C49F.2 C50E.2 C50F.2 C80E.2 C80F.2 C83E.2 C83F.2 C90E.1 C90F.1 C91E.2 C91F.2 C94E.1 C94F.1 C95E.2 C95F.2 C102C.2 R39C.1 U2B.6 U5E.23 U5F.23 U6E.4 U6F.4 U7E.6 U7F.6 U11C.3 U18E.2 U18E.17 U18F.2 U18F.17 U19E.2 U19E.17 U19F.2 U19F.17 | length 2242.7
  TopLayer w6.5: U7E.6@867.82,2137.68 867.82,2113.96 896.79,2084.99 v1(906.99,2084.99) ; U7F.6@868.2,1669.97 868.2,1646.25 897.18,1617.28 v1(907.38,1617.28) ; U2B.6@1013.18,1352.11 v1(1062.21,1352.11) ; v1(1094.61,2113.54) 1094.61,2152.42 C95E.2@1099.53,2157.34 ; v1(1094.99,1645.83) 1094.99,1684.71 C95F.2@1099.91,1689.63 ; v1(1332.41,2114.34) C91E.2@1332.41,2151.76 ; v1(1332.8,1646.63) C91F.2@1332.8,1684.05 ; U6E.4@1603.98,2117.13 v1(1603.98,2174.14) ; U6F.4@1604.37,1649.42 v1(1604.37,1706.43) ; U5E.23@1735.61,2174.34 v1(1797.44,2174.34) ; U5F.23@1736,1706.63 v1(1797.83,1706.63)
  TopLayer w15: v5(2292.65,1550.31) U11C.3@2350.88,1550.31
  BottomLayer w6.5: C45E.2@870.12,2080.34 874.77,2084.99 907.61,2084.99 907.61,2120.28 C46E.2@876.2,2151.7 ; C45F.2@870.5,1612.63 875.15,1617.28 908,1617.28 908,1652.58 C46F.2@876.58,1683.99 ; C10B.2@1018.89,1385.46 1018.89,1369.11 1035.89,1352.11 v1(1062.21,1352.11) ; C9B.1@1025.8,1441.4 v1(1065.8,1441.4) ; C94E.1@1087.61,2071.34 1094.61,2078.33 v1(1094.61,2113.54) U19E.2@1094.61,2144.8 ; C94F.1@1088,1603.63 1094.99,1610.62 v1(1094.99,1645.83) U19F.2@1094.99,1677.09 ; C90E.1@1287.61,2073.34 1312.61,2073.34 1332.41,2093.13 v1(1332.41,2114.34) U18E.2@1332.41,2145.6 ; C90F.1@1288,1605.63 1313,1605.63 1332.8,1625.43 v1(1332.8,1646.63) U18F.2@1332.8,1677.89 ; C83E.2@1586.61,2072.34 1598.61,2084.34 C80E.2@1598.61,2138.34 1603.98,2143.71 v1(1603.98,2174.14) ; C83F.2@1587,1604.63 1599,1616.63 C80F.2@1599,1670.63 1604.37,1676 v1(1604.37,1706.43) ; v1@1797.24,2174.14 v1(1797.44,2174.34) 1861.61,2174.34 1871.98,2184.71 C36E.2@1871.98,2202.34 1871.98,2224.24 v1(1886.45,2238.71) ; v1@1797.63,1706.43 v1(1797.83,1706.63) 1862,1706.63 1872.37,1717 C36F.2@1872.37,1734.63 1872.37,1756.53 v1(1886.84,1771) ; C37E.2@1858.98,2257.34 1872.82,2257.34 1886.45,2243.71 v1(1886.45,2238.71) ; C37F.2@1859.37,1789.63 1873.21,1789.63 1886.84,1776 v1(1886.84,1771) ; C49E.2@1911.98,2314.14 1912.61,2314.77 v1(1912.61,2374.34) ; C49F.2@1912.37,1846.43 1913,1847.06 v1(1913,1906.63) ; C50E.2@1916.61,2241.71 1913.61,2238.71 v1(1886.45,2238.71) ; C50F.2@1917,1774 1914,1771 v1(1886.84,1771) ; R39C.1@2337.12,1550.31 R39C.1@2337.5,1550.69
  BottomLayer w15: v5(2292.65,1550.31) R39C.1@2337.12,1550.31 ; R39C.1@2342.5,1550.69 2404.22,1550.69 C102C.2@2411.22,1543.69
  other v3: 1060.54,1734.18 1103.85,1734.18 1298.35,1734.98 1341.65,1734.98 1060.54,1777.49 1103.85,1777.49 1298.35,1778.28 1341.65,1778.28 1060.16,2201.89 1103.46,2201.89 1297.96,2202.69 1341.27,2202.69 1060.16,2245.2 1103.46,2245.2 1297.96,2245.99 1341.27,2245.99
VSS2A: C11A.2 C12A.1 C36C.2 C36D.2 C37C.2 C37D.2 C45C.2 C45D.2 C46C.2 C46D.2 C49C.2 C49D.2 C50C.2 C50D.2 C80C.2 C80D.2 C83C.2 C83D.2 C90C.1 C90D.1 C91C.2 C91D.2 C94C.1 C94D.1 C95C.2 C95D.2 C102B.2 R39B.1 U4A.6 U5C.23 U5D.23 U6C.4 U6D.4 U7C.6 U7D.6 U11B.3 U18C.2 U18C.17 U18D.2 U18D.17 U19C.2 U19C.17 U19D.2 U19D.17 | length 2248.5
  TopLayer w6.5: v1(357.76,3872.12) U4A.6@405.79,3872.12 ; U7C.6@411.51,2925.36 411.51,2901.64 440.49,2872.67 v1(450.69,2872.67) ; U7D.6@412.13,3393.32 412.13,3369.61 441.1,3340.63 v1(451.3,3340.63) ; v1(638.3,2901.22) 638.3,2940.1 C95C.2@643.22,2945.02 ; v1(638.92,3369.19) 638.92,3408.07 C95D.2@643.84,3412.99 ; v1(876.11,2902.02) C91C.2@876.11,2939.44 ; v1(876.72,3369.99) C91D.2@876.72,3407.41 ; U6C.4@1147.68,2904.81 v1(1147.68,2961.82) ; U6D.4@1148.29,3372.78 v1(1148.29,3429.79) ; U5C.23@1279.31,2962.02 v1(1341.14,2962.02) ; U5D.23@1279.92,3429.99 v1(1341.75,3429.99)
  TopLayer w15: v5(1836.96,2805.95) U11B.3@1900.19,2805.95
  BottomLayer w6.5: v1(353.17,3782.82) C12A.1@393.17,3782.82 ; v1(357.76,3872.12) 387.87,3872.12 400.08,3859.91 C11A.2@400.08,3838.77 ; C45C.2@413.81,2868.02 418.46,2872.67 451.31,2872.67 451.31,2907.96 C46C.2@419.89,2939.38 ; C45D.2@414.43,3335.99 419.08,3340.63 451.92,3340.63 451.92,3375.93 C46D.2@420.51,3407.35 ; C94C.1@631.31,2859.02 638.3,2866.01 v1(638.3,2901.22) U19C.2@638.3,2932.48 ; C94D.1@631.92,3326.99 638.92,3333.98 v1(638.92,3369.19) U19D.2@638.92,3400.45 ; C90C.1@831.31,2861.02 856.31,2861.02 876.11,2880.81 v1(876.11,2902.02) U18C.2@876.11,2933.28 ; C90D.1@831.92,3328.99 856.92,3328.99 876.72,3348.78 v1(876.72,3369.99) U18D.2@876.72,3401.25 ; C83C.2@1130.31,2860.02 1142.31,2872.02 C80C.2@1142.31,2926.02 1147.68,2931.39 v1(1147.68,2961.82) ; C83D.2@1130.92,3327.99 1142.92,3339.99 C80D.2@1142.92,3393.99 1148.29,3399.36 v1(1148.29,3429.79) ; v1@1340.94,2961.82 v1(1341.14,2962.02) 1405.31,2962.02 1415.68,2972.39 C36C.2@1415.68,2990.02 1415.68,3011.92 v1(1430.15,3026.39) ; v1@1341.55,3429.79 v1(1341.75,3429.99) 1405.92,3429.99 1416.29,3440.36 C36D.2@1416.29,3457.99 1416.29,3479.89 v1(1430.76,3494.36) ; C37C.2@1402.68,3045.02 1416.52,3045.02 1430.15,3031.39 v1(1430.15,3026.39) ; C37D.2@1403.29,3512.99 1417.13,3512.99 1430.76,3499.36 v1(1430.76,3494.36) ; C49C.2@1455.68,3101.82 1456.31,3102.45 v1(1456.31,3162.02) ; C49D.2@1456.29,3569.79 1456.92,3570.42 v1(1456.92,3629.99) ; C50C.2@1460.31,3029.39 1457.31,3026.39 v1(1430.15,3026.39) ; C50D.2@1460.92,3497.36 1457.92,3494.36 v1(1430.76,3494.36) ; R39B.1@1886.43,2805.95 R39B.1@1886.81,2806.34
  BottomLayer w15: v5@1831.96,2805.95 R39B.1@1876.43,2805.95 ; R39B.1@1886.81,2806.34 1948.53,2806.34 C102B.2@1955.53,2799.34
  other v3: 603.85,2989.57 647.16,2989.57 841.66,2990.36 884.96,2990.36 603.85,3032.88 647.16,3032.88 841.66,3033.67 884.96,3033.67 604.47,3457.54 647.77,3457.54 842.27,3458.33 885.58,3458.33 604.47,3500.84 647.77,3500.84 842.27,3501.64 885.58,3501.64
VSS2B: C11B.2 C12B.1 C36G.2 C36H.2 C37G.2 C37H.2 C45G.2 C45H.2 C46G.2 C46H.2 C49G.2 C49H.2 C50G.2 C50H.2 C80G.2 C80H.2 C83G.2 C83H.2 C90G.1 C90H.1 C91G.2 C91H.2 C94G.1 C94H.1 C95G.2 C95H.2 C102D.2 R39D.1 U4B.6 U5G.23 U5H.23 U6G.4 U6H.4 U7G.6 U7H.6 U11D.3 U18G.2 U18G.17 U18H.2 U18H.17 U19G.2 U19G.17 U19H.2 U19H.17 | length 2262.5
  TopLayer w6.5: v1@799.45,1142.47 U4B.6@848.48,1142.47 ; U7G.6@867.82,190.97 867.82,167.25 896.79,138.28 v1(906.99,138.28) ; U7H.6@867.82,657.68 867.82,633.96 896.79,604.99 v1(906.99,604.99) ; v1(1094.61,166.83) 1094.61,205.71 C95G.2@1099.53,210.63 ; v1(1094.61,633.54) 1094.61,672.42 C95H.2@1099.53,677.34 ; v1(1332.41,167.63) C91G.2@1332.41,205.05 ; v1(1332.41,634.34) C91H.2@1332.41,671.76 ; U6G.4@1603.98,170.42 v1(1603.98,227.43) ; U6H.4@1603.98,637.13 v1(1603.98,694.14) ; U5G.23@1735.61,227.63 v1(1797.44,227.63) ; U5H.23@1735.61,694.34 v1(1797.44,694.34)
  TopLayer w15: U11D.3@2876.14,193.69 v5(2876.14,261.93)
  BottomLayer w6.5: v1(792.86,1053.17) C12B.1@832.86,1053.17 ; v1@799.45,1142.47 827.56,1142.47 839.77,1130.26 C11B.2@839.77,1109.12 ; C45G.2@870.12,133.63 874.77,138.28 907.61,138.28 907.61,173.58 C46G.2@876.2,204.99 ; C45H.2@870.12,600.34 874.77,604.99 907.61,604.99 907.61,640.28 C46H.2@876.2,671.7 ; C94G.1@1087.61,124.63 1094.61,131.62 v1(1094.61,166.83) U19G.2@1094.61,198.09 ; C94H.1@1087.61,591.34 1094.61,598.33 v1(1094.61,633.54) U19H.2@1094.61,664.8 ; C90G.1@1287.61,126.63 1312.61,126.63 1332.41,146.43 v1(1332.41,167.63) U18G.2@1332.41,198.89 ; C90H.1@1287.61,593.34 1312.61,593.34 1332.41,613.13 v1(1332.41,634.34) U18H.2@1332.41,665.6 ; C83G.2@1586.61,125.63 1598.61,137.63 C80G.2@1598.61,191.63 1603.98,197 v1(1603.98,227.43) ; C83H.2@1586.61,592.34 1598.61,604.34 C80H.2@1598.61,658.34 1603.98,663.71 v1(1603.98,694.14) ; v1@1797.24,227.43 v1(1797.44,227.63) 1861.61,227.63 1871.98,238 C36G.2@1871.98,255.63 1871.98,277.53 v1(1886.45,292) ; v1@1797.24,694.14 v1(1797.44,694.34) 1861.61,694.34 1871.98,704.71 C36H.2@1871.98,722.34 1871.98,744.24 v1(1886.45,758.71) ; C37G.2@1858.98,310.63 1872.82,310.63 1886.45,297 v1(1886.45,292) ; C37H.2@1858.98,777.34 1872.82,777.34 1886.45,763.71 v1(1886.45,758.71) ; C49G.2@1911.98,367.43 1912.61,368.06 v1(1912.61,427.63) ; C49H.2@1911.98,834.14 1912.61,834.77 v1(1912.61,894.34) ; C50G.2@1916.61,295 1913.61,292 v1(1886.45,292) ; C50H.2@1916.61,761.71 1913.61,758.71 v1(1886.45,758.71) ; R39D.1@2876.14,207.46 R39D.1@2876.53,207.07
  BottomLayer w15: C102D.2@2869.53,138.36 2876.53,145.36 R39D.1@2876.53,207.07 ; R39D.1@2876.14,207.46 v5(2876.14,261.93)
  other v1: 796.45,1142.47
  other v3: 1060.16,255.18 1103.46,255.18 1297.96,255.98 1341.27,255.98 1060.16,298.49 1103.46,298.49 1297.96,299.28 1341.27,299.28 1060.54,721.89 1103.85,721.89 1297.96,722.69 1341.27,722.69 1060.54,765.2 1103.85,765.2 1297.96,765.99 1341.27,765.99
pads on no net: L10A.2@3499.14,3104.01 L10B.2@3499.14,1551.63 P1.A2 P1.A3 P1.A6 P1.A7 P1.A10 P1.A11 P1.A14 P1.A15 P1.A18 P1.A19 P1.A22 P1.A23 P1.A26 P1.A27 P1.A30 P1.A31 P1.A34 P1.A35 P1.A38 P1.A39 P1.B1 P1.B4 P1.B5 P1.B8 P1.B9 P1.B12 P1.B13 P1.B16 P1.B17 P1.B20 P1.B21 P1.B24 P1.B25 P1.B28 P1.B29 P1.B32 P1.B33 P1.B36 P1.B37 P1.B40 P1.D1 P1.D29 P1.D33 P1.D34 P1.E2 P1.E3 P1.E6 P1.E7 P1.E9 P1.E10 P1.E12 P1.E13 P1.E15 P1.E16 P1.E18 P1.E19 P1.E21 P1.E22 P1.E24 P1.E25 P1.E27 P1.E28 P1.E30 P1.E31 P1.E33 P1.E34 P1.E36 P1.E37 P1.F1 P1.F4 P1.F5 P1.F7 P1.F8 P1.F10 P1.F11 P1.F13 P1.F14 P1.F16 P1.F17 P1.F19 P1.F20 P1.F22 P1.F23 P1.F25 P1.F26 P1.F28 P1.F29 P1.F31 P1.F32 P1.F34 P1.F35 P1.F37 P1.F38 P1.H1 P1.J2 P1.J3 P1.J6 P1.J9 P1.J10 P1.J12 P1.J13 P1.J15 P1.J16 P1.J18 P1.J19 P1.J21 P1.J22 P1.J24 P1.J25 P1.J27 P1.J28 P1.J30 P1.J31 P1.J33 P1.J34 P1.K1 P1.K4 P1.K5 P1.K7 P1.K8 P1.K10 P1.K11 P1.K13 P1.K14 P1.K16 P1.K17 P1.K19 P1.K20 P1.K22 P1.K23 P1.K25 P1.K26 P1.K28 P1.K29 P1.K31 P1.K32 P1.K34 P1.K35 P1.K37 P1.K38 P1.MH1 P1.MH2 P2.0 U2A.7 U2B.7 U3A.23 U3A.24 U3A.25 U3A.26 U3A.37 U3A.38 U3A.39 U3A.40 U3B.23 U3B.24 U3B.25 U3B.26 U3B.37 U3B.38 U3B.39 U3B.40 U4A.7 U4B.7 U6A.0 U6B.0 U6C.0 U6D.0 U6E.0 U6F.0 U6G.0 U6H.0 U7A.7 U7B.7 U7C.7 U7D.7 U7E.7 U7F.7 U7G.7 U7H.7 U8A.11 U8B.11 U8C.11 U8D.11 U9A.0 U9B.0 U9C.0 U9D.0 U11A.0 U11B.0 U11C.0 U11D.0 U12A.18 U12B.18 U13.5 U14.7 U15.1 U16.5 U18A.10 U18B.10 U18C.10 U18D.10 U18E.10 U18F.10 U18G.10 U18H.10 U19A.10 U19B.10 U19C.10 U19D.10 U19E.10 U19F.10 U19G.10 U19H.10 U20.5